# Altium PCB MainBoard.PcbDoc (part 1 of 2)
Units mm, origin at the board's own origin, x right, y up, seen from the top; angles counter-clockwise.
Board outline 100 x 91.6 mm, 4 copper layers (Top Signal, GND, PWR, Bottom Signal), stack 1.586 mm thick; 83 components, 119 nets, 486 pads, 208 vias.
Unrouted connection lines stored in the file: 7.
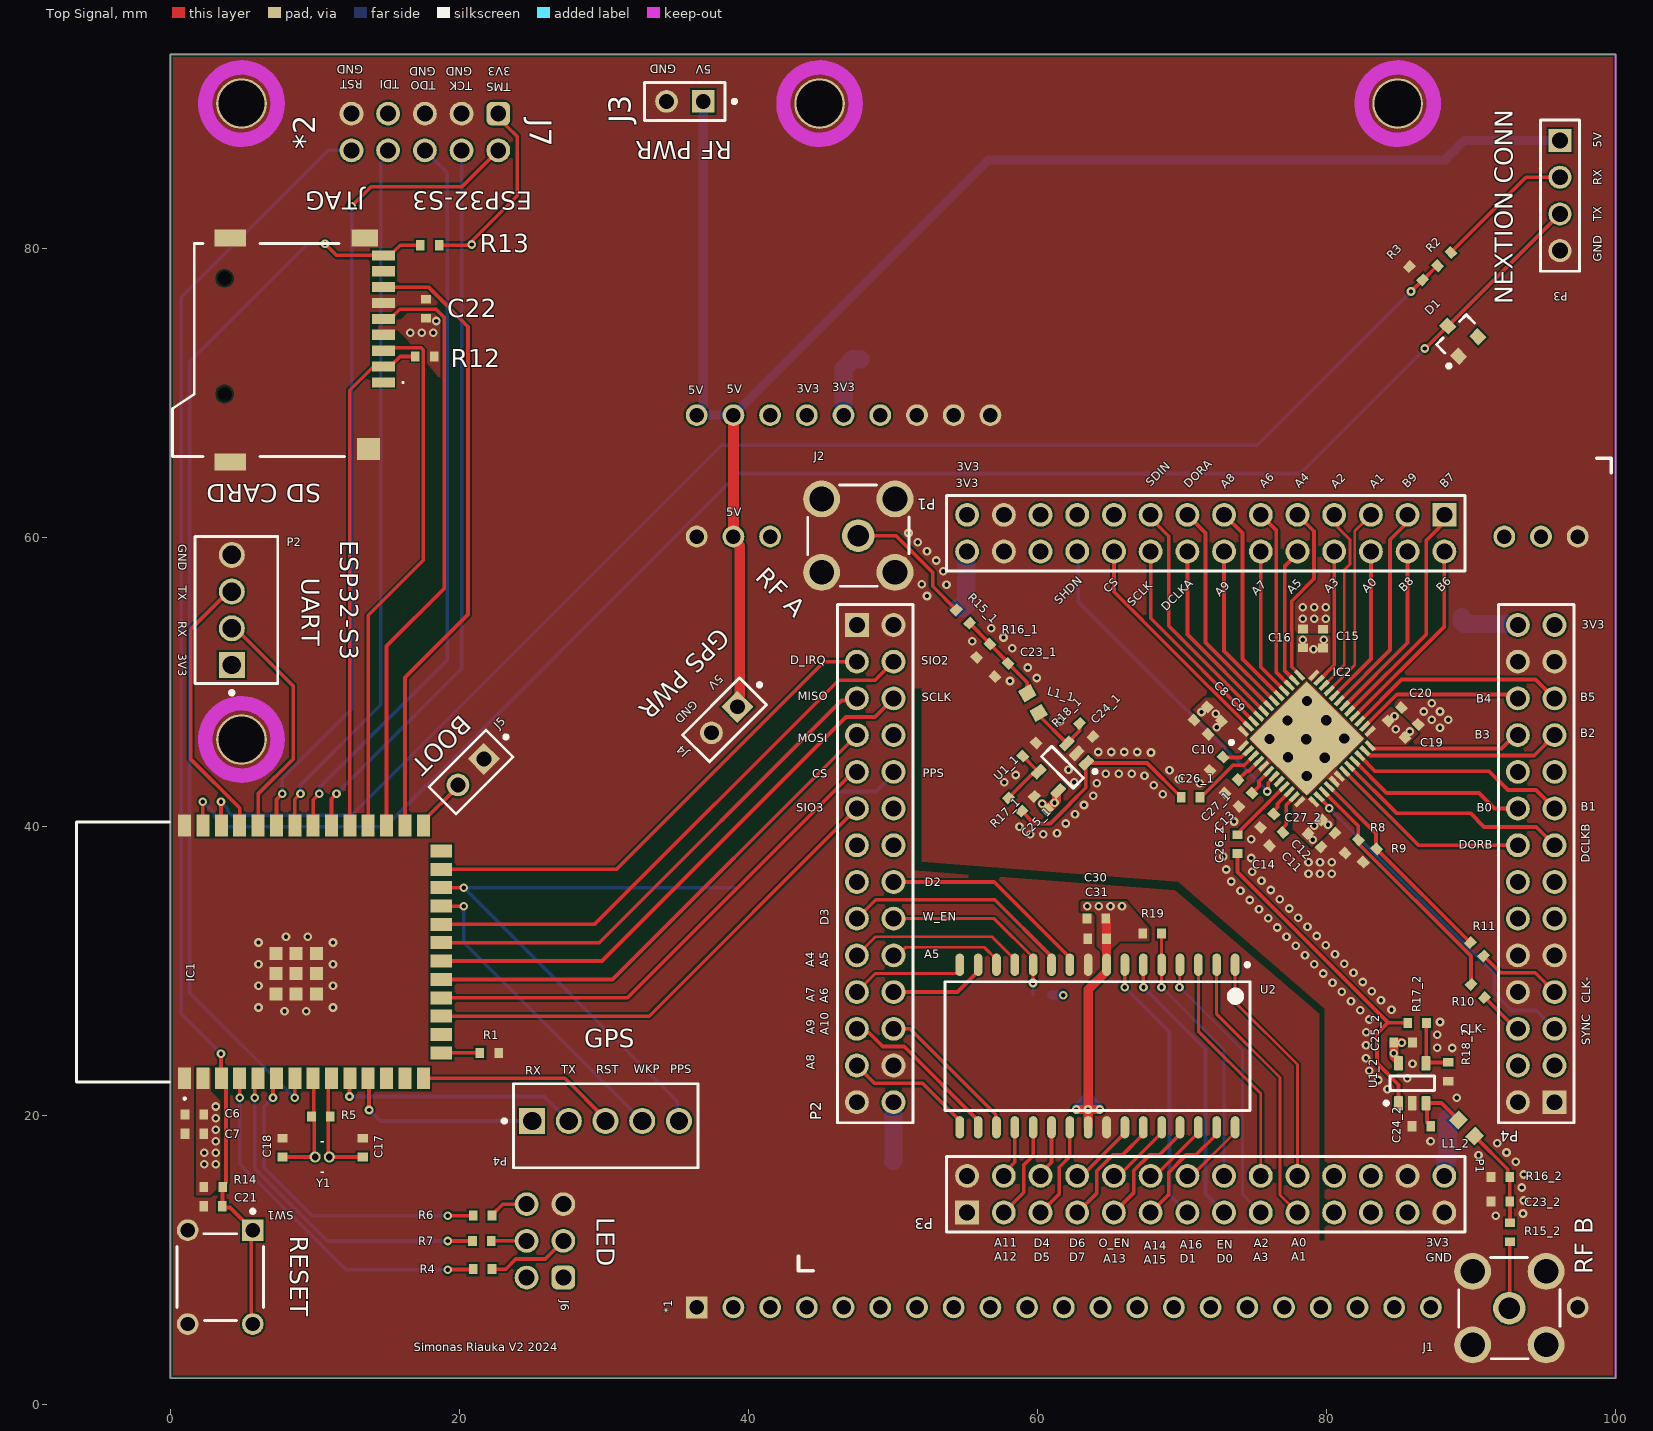
[diagram p0: Top Signal view]
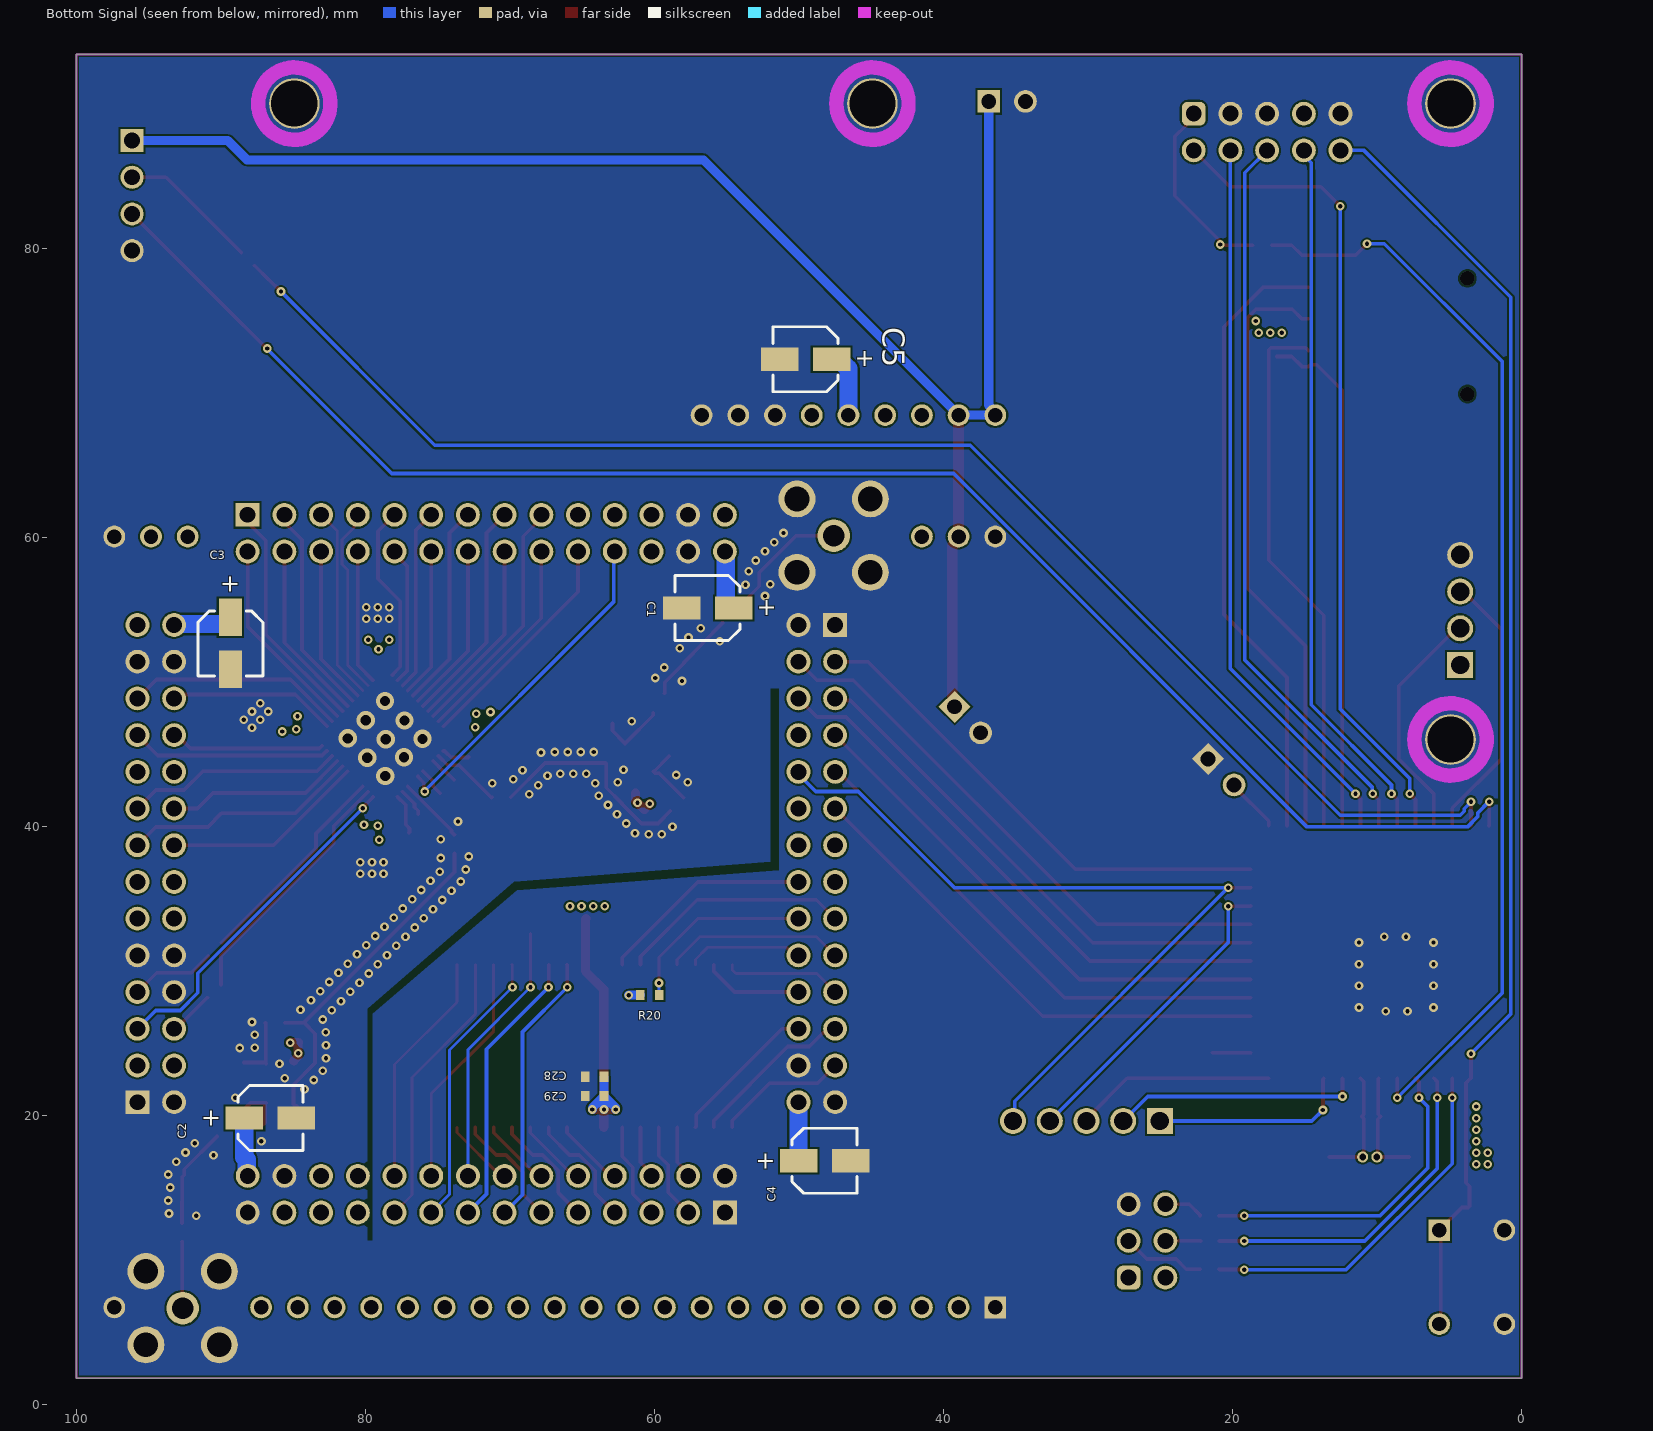
[diagram p1: Bottom Signal view, seen from below]
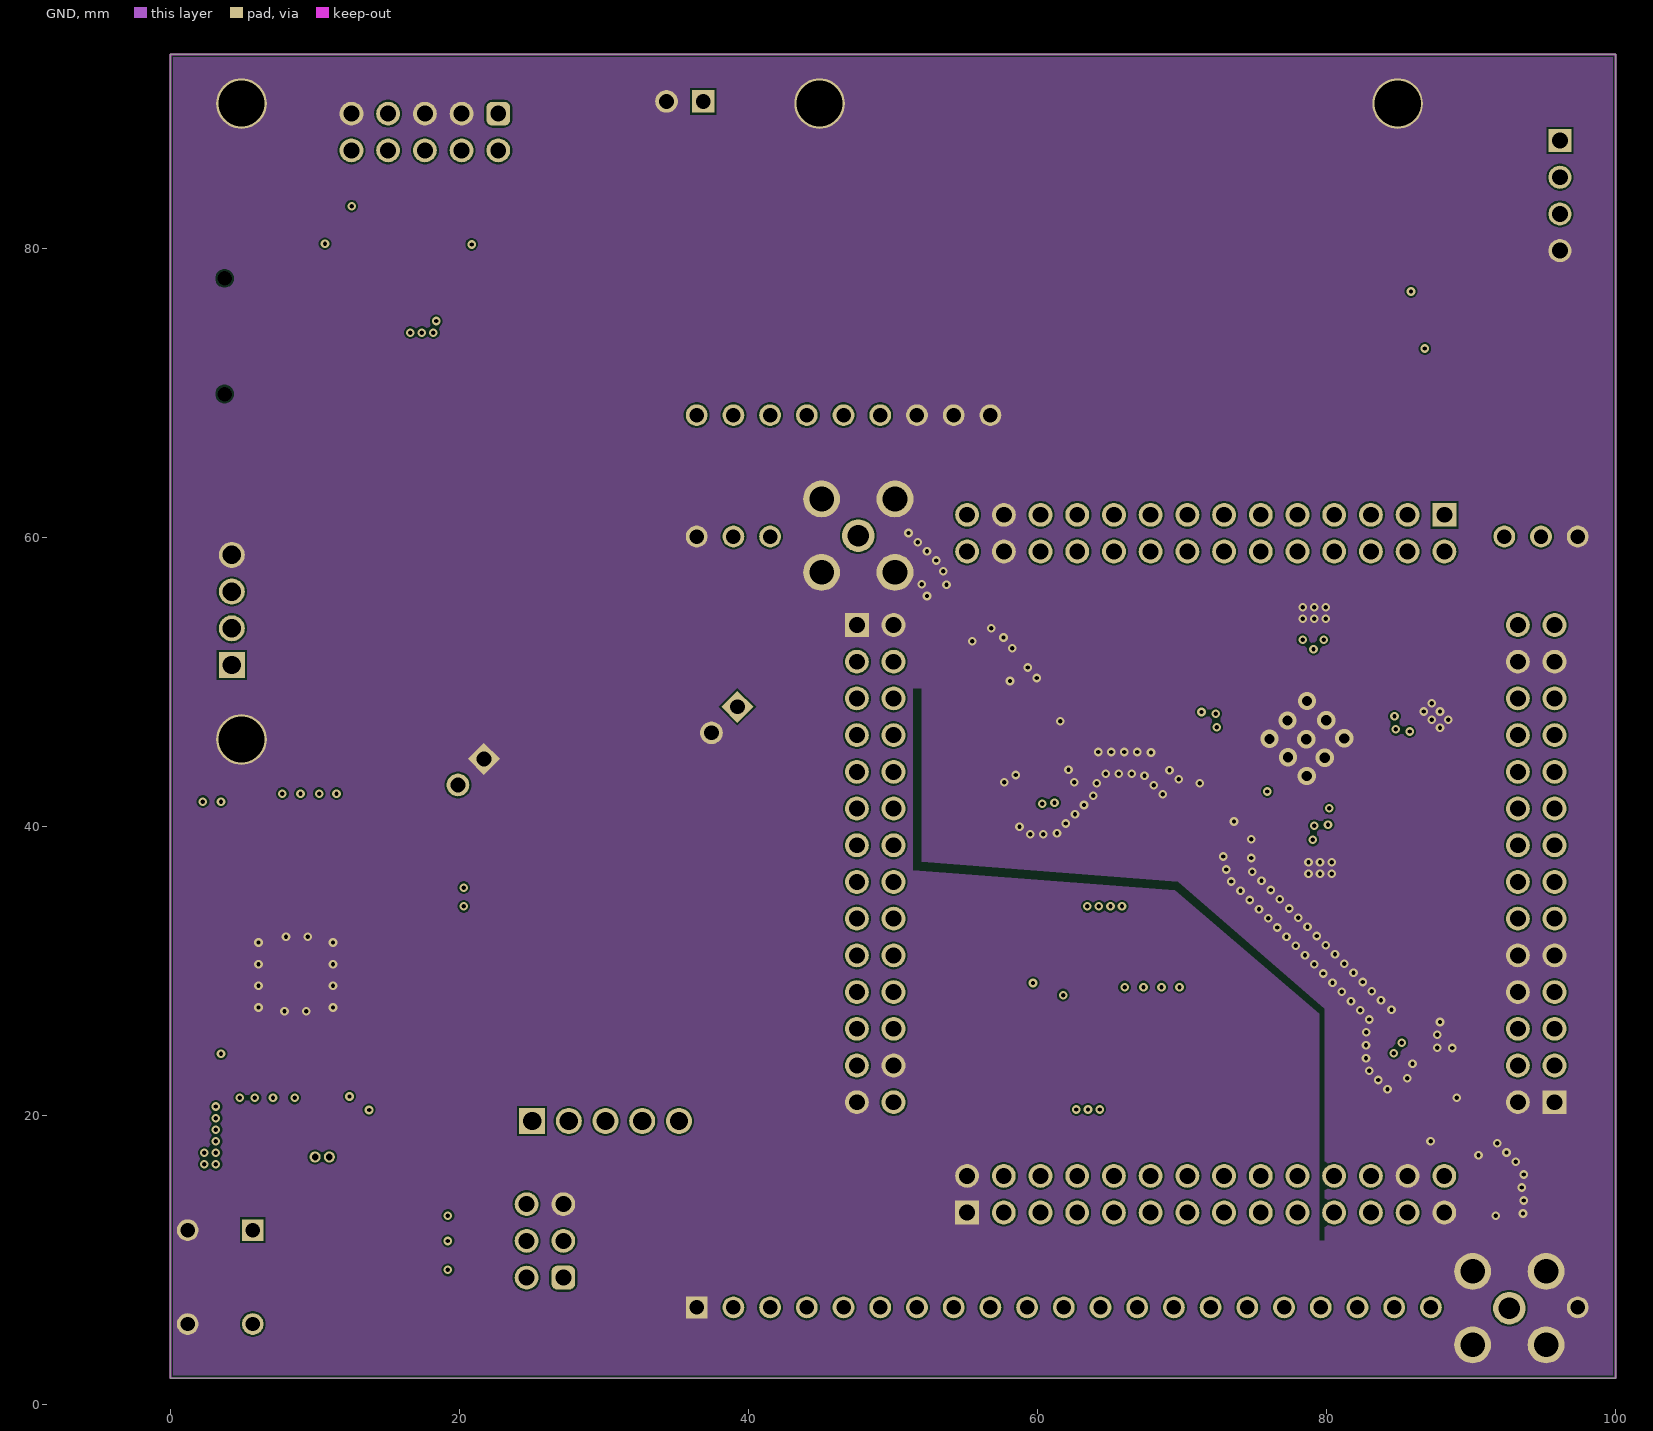
[diagram p2: GND]
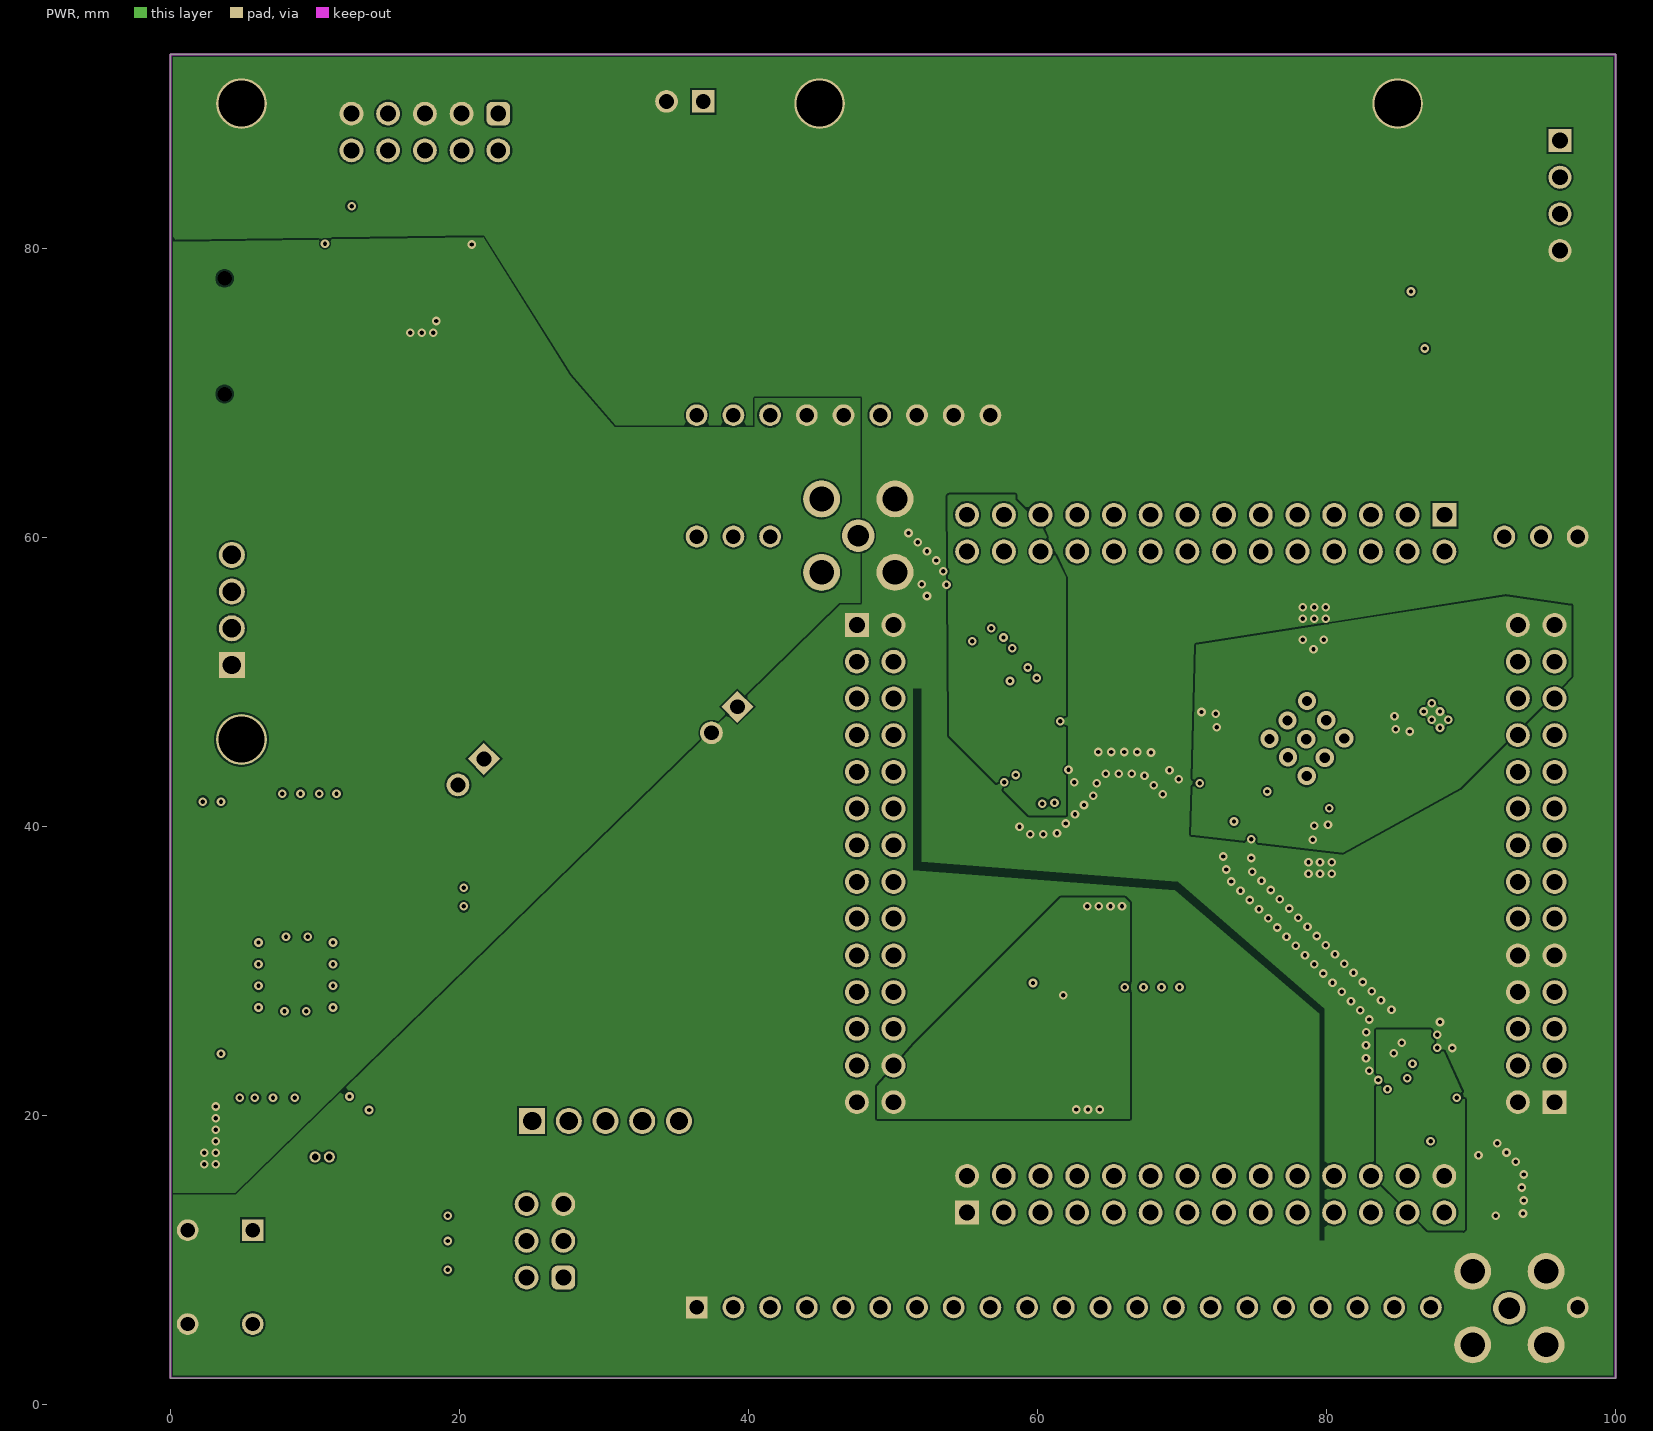
[diagram p3: PWR]

## Layer stack, top to bottom
Top Solder: solder mask 0.0102, Solder Resist, Dk 3.5
Top Signal: signal copper 0.035
Dielectric 2: prepreg 0.2104, PP-006, Dk 4.4
GND: signal copper 0.0152
Dielectric 1: core 1.065, FR-4, Dk 4.6
PWR: signal copper 0.0152
Dielectric 3: prepreg 0.2104, PP-006, Dk 4.4
Bottom Signal: signal copper 0.035
Bottom Solder: solder mask 0.0102, Solder Resist, Dk 3.5

## Board outline
0,1.8 100,1.8 100,93.4 0,93.4

## Design rules (kind name [scope] priority, off if disabled: settings)
Clearance [All] p1: gap=0.127 ignorepadtopadclearanceinfootprint=FALSE
HoleSize [IsVia] p1: absolutevalues=TRUE maxlimit=2.54 minlimit=0.2 maxpercent=80.000 minpercent=20.000
HoleToHoleClearance [All] p1: gap=0.5 allowstackedmicrovias=TRUE
MatchedLengths [InNetClass('BIT579')] p1: tolerance=0.1 checknetsindiffpair=FALSE checkdiffpairvsdiffpair=TRUE checkxsignals=TRUE checkothers=TRUE
MinimumAnnularRing MinimumAnnularRing_1 [All] p1: minimumring=0.13
MinimumSolderMaskSliver [All] p1: minsoldermaskwidth=0.2
PolygonConnect [All] p1: connectstyle=Direct reliefconductorwidth=0.127 reliefentries=4 polygonreliefangle="90 Angle" airgapwidth=0.127
RoutingVias [InNetClass('All Nets')] p1: holewidth=0.711 width=1.27 viastyle="Through Hole" minholewidth=0.3 minwidth=0.5 maxholewidth=0.711 maxwidth=1.27
SilkToSolderMaskClearance [IsPad] p1: minsilkscreentomaskgap=0.152 clearancetoexposedcopper=TRUE
SolderMaskExpansion [All] p1: expansion=0.05 istentingtop=FALSE
Width Text_width [OnLayer('Top Overlay')] p1: maxlimit=0.254 minlimit=0.152 preferedwidth=0.152
Width RF [InNetClass('RF')] p2: maxlimit=0.264 minlimit=0.181 preferedwidth=0.264 toplayer_minwidth=0.264 midlayer1_maxwidth=0.181 midlayer1_prefwidth=0.181 midlayer2_maxwidth=0.181 midlayer2_prefwidth=0.181 bottomlayer_minwidth=0.264 impedanceprofiledriven=TRUE impedanceprofileid={7C84431C-2315-4997-B833-9ADEEC1D2196} impedanceprofilevalue=50.000000 minimp=50.000000 maximp=50.000000 favimp=50.000000
Width [All] p3: maxlimit=2.54 minlimit=0.152 preferedwidth=0.254
26 further rules are at their usual default settings.

## Classes and differential pairs
component class U_Memory: C28 C29 C30 C31 R19 R20 U2
component class U_Connectors: *1 C7 C9 C10 C13 J5 J6 P1
channel class RF_opamp: 1 2
channel class RF_filter: 1 2
component class 1: C25_1 C26_1 C27_1 R17_1 R18_1 U1_1
component class 2: C25_2 C26_2 C27_2 R17_2 R18_2 U1_2
component class 1: C23_1 C24_1 L1_1 R15_1 R16_1
component class 2: C23_2 C24_2 L1_2 R15_2 R16_2
net class RF: ANALOG_INA ANALOG_INB NetC23_1_2 NetC23_2_2 NetC26_1_2 NetC26_2_2 OP_AMP_INA+ OP_AMP_INB+
component class U_Computation: *2 C7 C9 C10 C13 C17 C18 C19 C20 C21 C28 D1 IC1 IC2 J1 J5 J6 P2 P3 P4 R1 R9 R10 R11 R12 R13 R14 SW1 Y1

## Components (designator, comment, footprint, x,y, rotation, side; value= is the part's Value field where it differs from the comment)
*1 "ADS-B_POWER_PCB" ADS-B_POWER_PCB 64.71,40.572 r90 top locked
*2 "2x5_Header" 2X5_HEADER 22.69,89.3 r270 top
C1 "865060640001" WCAP-ASLL_D4H5.5 -1213.678,1325.1 r180 bottom
C2 "865060640001" WCAP-ASLL_D4H5.5 1356.578,-1250.2 r0 bottom
C3 "865060640001" WCAP-ASLL_D4H5.5 1359.35,1322.65 r90 bottom
C4 "865060640001" WCAP-ASLL_D4H5.5 1318.228,-1253.15 r0 bottom
C5 "865060640001" WCAP-ASLL_D4H5.5 -1220.455,1342.309 r180 bottom
C6 "22uF" 0402_FOOTPRINT 1.015,20.062 r0 top
C7 "0.1uF" 0402_FOOTPRINT 1.008,18.72 r0 top
C8 "0.05uF" 0402_FOOTPRINT 70.832,47.339 r45 top
C9 "0.05uF" 0402_FOOTPRINT 71.801,46.358 r45 top
C10 "0.1uF" 0402_FOOTPRINT 72.85,44.781 r225 top
C11 "0.05uF" 0402_FOOTPRINT 79.628,38.564 r135 top
C12 "0.05uF" 0402_FOOTPRINT 80.578,39.514 r135 top
C13 "0.1uF" 0402_FOOTPRINT 73.931,41.362 r45 top
C14 "0.1uF" 0402_FOOTPRINT 76.061,38.643 r45 top
C15 "0.05uF" 0402_FOOTPRINT 79.755,53.629 r270 top
C16 "0.05uF" 0402_FOOTPRINT 78.376,53.637 r270 top
C17 "22pF" 0402_FOOTPRINT 13.315,17.112 r90 top
C18 "22pF" 0402_FOOTPRINT 7.765,17.112 r90 top
C19 "0.05uF" 0402_FOOTPRINT 86.347,47.042 r225 top
C20 "0.05uF" 0402_FOOTPRINT 85.18,48.208 r225 top
C21 "0.1uF" 0402_FOOTPRINT 2.3,13.7 r0 top
C22 "22pF" 0402_footprint 17.7,75.15 r90 top
C23_1 "1.6nF" 0402_FOOTPRINT 57.05,50.35 r45 top (schematic designator C23)
C23_2 "1.6nF" 0402_FOOTPRINT 91.378,14.03 r0 top (schematic designator C23)
C24_1 "1.6nF" 0402_FOOTPRINT 63.831,46.191 r135 top (schematic designator C24)
C24_2 "1.6nF" 0402_FOOTPRINT 85.912,19.238 r0 top (schematic designator C24)
C25_1 "0.1uF" 0402_FOOTPRINT 59.774,42.065 r315 top (schematic designator C25)
C25_2 "0.1uF" 0402_FOOTPRINT 85.954,25.026 r180 top (schematic designator C25)
C26_1 "0.1uF" 0402_FOOTPRINT 71.25,42 r180 top (schematic designator C26)
C26_2 "0.1uF" 0402_FOOTPRINT 73.831,39.412 r270 top (schematic designator C26)
C27_1 "0.1uF" 0402_FOOTPRINT 72.961,42.293 r45 top (schematic designator C27)
C27_2 "0.1uF" 0402_FOOTPRINT 75.431,39.912 r45 top (schematic designator C27)
C28 "0.1uF" 0402_FOOTPRINT 64.79,22.66 r180 bottom
C29 "0.1uF" 0402_FOOTPRINT 64.79,21.334 r180 bottom
C30 "0.1uF" 0402_FOOTPRINT 63.431,33.612 r0 top
C31 "0.1uF" 0402_FOOTPRINT 63.481,32.212 r0 top
D1 "MMBZ5227BLT1G" ONSC-SOT-23-3-318-08_V 89.1,73.9 r135 top
IC1 "ESP32-S3-WROOM-1-N8R8" ESP32S3WROOM1N8R8 6.25,31.3 r90 top
IC2 "MAX19516ETM+" QFN50P700X700X80-49N 78.63,46.06 r45 top
J1 "60312002114503" 60312002114503 92.65,6.65 r0 top
J2 "60312002114503" 60312002114503 47.6,60.1 r0 top
J3 "M20-9990246" FP-M20-9990246-MFG 35.6,90.15 r180 top
J4 "M20-9990246" FP-M20-9990246-MFG 38.338,47.358 r225 top
J5 "M20-9990246" FP-M20-9990246-MFG 20.8,43.75 r225 top
J6 "2x3_Header" "2X3 HEADER" 24.65,8.764 r180 top
J7 "MSD-4-A" MSD4A 7.85,72.95 r270 top
L1_1 "4.7uH" 0603_FOOTPRINT 60.085,47.84 r30 top (schematic designator L1)
L1_2 "4.7uH" 0603_FOOTPRINT 89.14,19.66 r225 top (schematic designator L1)
P1 "FPGA_Shield_headers" FPGA_SHIELD_HEADER_FOOTPRINT 99.818,65.585 r180 top locked
P2 "640456-4" TECO-640456-4 4.25,54.96 r270 top
P3 "61300411121" 61300411121 96.15,83.63 r270 top
P4 "ADS-B_GPS" ADS-B_GPS 30.122,19.64 r0 top
R1 "10kOhm" 0402_FOOTPRINT 22.715,24.312 r180 top
R2 "10kOhm" 0402_footprint 88.604,79.695 r225 top
R3 "10kOhm" 0402_footprint 85.731,78.719 r315 top
R4 "0402" 0402_FOOTPRINT 22.25,9.35 r180 top
R5 "10MOhm" 0402_FOOTPRINT 9.765,19.912 r0 top
R6 "0402" 0402_FOOTPRINT 22.25,13.05 r180 top
R7 "0402" 0402_FOOTPRINT 20.9,11.3 r0 top
R8 "0402" 0402_FOOTPRINT 82.2,39.05 r225 top
R9 "0402" 0402_FOOTPRINT 83.462,38.43 r225 top
R10 "0402" 0402_FOOTPRINT 90.919,28.131 r135 top
R11 "0402" 0402_FOOTPRINT 89.955,31.937 r315 top
R12 "10kOhm" 0402_footprint 16.95,72.5 r0 top
R13 "10kOhm" 0402_footprint 17.3,80.2 r0 top
R14 "0402" 0402_FOOTPRINT 3.615,15.037 r180 top
R15_1 "0402" 0402_FOOTPRINT 54.381,54.969 r315 top (schematic designator R15)
R15_2 "0402" 0402_FOOTPRINT 92.7,11.25 r90 top (schematic designator R15)
R16_1 "0402" 0402_FOOTPRINT 55.781,51.681 r45 top (schematic designator R16)
R16_2 "0402" 0402_FOOTPRINT 91.378,15.727 r0 top (schematic designator R16)
R17_1 "open" 0402_FOOTPRINT 57.99,41.963 r315 top (schematic designator R17)
R17_2 "open" 0402_FOOTPRINT 86.919,26.37 r180 top (schematic designator R17)
R18_1 "open" 0402_FOOTPRINT 59.901,45.763 r225 top (schematic designator R18)
R18_2 "open" 0402_FOOTPRINT 88.42,22.357 r90 top (schematic designator R18)
R19 "10k" 0402_FOOTPRINT 68.581,32.562 r180 top
R20 "10k" 0402_FOOTPRINT 59.681,28.312 r0 bottom
SW1 "1825910-6" TECO-1825910-6_V 3.45,8.8 r270 top
U1_1 "LMH6645MF/NOPB" DBV0005A_N 61.733,44.078 r225 top (schematic designator U1)
U1_2 "LMH6645MF/NOPB" DBV0005A_N 85.931,22.209 r90 top (schematic designator U1)
U2 "IS63LV1024L" ISSI-TSOP-2-32_N 64.146,24.787 r270 top
Y1 "ECS-.327-12.5-8X-C" ECS3271258XC 10.515,17.112 r180 top

## Footprints (in the part's own frame and the unit in brackets; to place one, negate y for a bottom-side part, rotate by r counter-clockwise, add the part's x,y. Pads: shape width x height; smd on the part's side, far side on the other; paste and mask are expansions set on the pad)
"2X3 HEADER" [mm]
  rrect50% 1.65x1.65 hole 1.1: 1(-2.54,0)
  round 1.65 hole 1.1: 2(0,0) 3(-2.54,-2.54) 4(0,-2.54) 5(-2.54,-5.08) 6(0,-5.08)
2X5_HEADER [mm]
  rrect50% 1.65x1.65 hole 1.1: 1(0,0)
  round 1.65 hole 1.1: 2(2.54,0) 3(0,-2.54) 4(2.54,-2.54) 5(0,-5.08) 6(2.54,-5.08) 7(0,-7.62) 8(2.54,-7.62) 9(0,-10.16) 10(2.54,-10.16)
0402_FOOTPRINT [mm]
  rect 0.6x0.7 smd: 1(0,0) 2(1.3,0)
0402_footprint [mm]
  rect 0.6x0.7 smd: 1(0,0) 2(1.3,0)
0603_FOOTPRINT [mm]
  rect 0.97x0.9 smd: 1(0,1.57) 2(0,0)
61300411121 [mm] "Pin Header, pitch 2.54 mm, THT, Vertical, single row, 4p"
  rect 1.6x1.6 hole 1.1: 1(-3.81,0)
  round 1.6 hole 1.1: 2(-1.27,0) 3(1.27,0) 4(3.81,0)
  silkscreen extent -5.23,-1.35 5.23,1.35, body extent -5.08,-1.27 5.08,1.27, height 8.57
60312002114503 [mm] "SMA PCB THT Jack Straight"
  round 2.25 hole 1.5: 1(0,0)
  round 2.55 hole 1.7: 2(-2.54,2.54) 3(2.54,2.54) 4(2.54,-2.54) 5(-2.54,-2.54)
  silkscreen extent -3.5,-3.5 3.5,3.5, body extent -3.5,-3.5 3.5,3.5, height 9.56
ADS-B_GPS [mm]
  rect 1.8x1.8 hole 1.27 paste-2539.97: 1(-5.092,-0.04)
  round 1.8 hole 1.27 paste-2539.97: 2(-2.552,-0.04) 3(-0.012,-0.04) 4(2.528,-0.04) 5(5.068,-0.04)
  silkscreen extent -7.14,-3.28 6.38,2.54, body extent -6.36,-3.22 6.34,2.63, height 10.29
ADS-B_POWER_PCB [mm]
  rect 1.508x1.508 hole 1: 1(-33.872,28.29)
  round 1.508 hole 1: 2(-33.872,25.75) 3(-33.872,23.21) 4(-33.872,20.67) 5(-33.872,18.13) 6(-33.872,15.59) 7(-33.872,13.05) 8(-33.872,10.51) 9(-33.872,7.97) 10(-33.872,5.43) 11(-33.872,2.89) 12(-33.872,0.35) 13(-33.872,-2.19) 14(-33.872,-4.73) 15(-33.872,-7.27) 16(-33.872,-9.81) 17(-33.872,-12.35) 18(-33.872,-14.89) 19(-33.872,-17.43) 20(-33.872,-19.97) 21(-33.872,-22.51) 25(-33.872,-32.67) 26(19.468,28.29) 27(19.468,25.75) 28(19.468,23.21) 35(19.468,-27.59) 36(19.468,-30.13) 37(19.468,-32.67) 38(27.868,28.29) 39(27.868,25.75) 40(27.868,23.21) 41(27.868,20.67) 42(27.868,18.13) 43(27.868,15.59) 44(27.868,13.05) 45(27.868,10.51) 46(27.868,7.97)
  round 3.5 hole 3.2: G(5.428,59.79) G(49.428,59.79) G(49.428,-20.21) G(49.428,19.79)
  Top Signal keep-out circle w1: c49.428,19.79 r2.5
  Top Signal keep-out circle w1: c49.428,-20.21 r2.5
  Top Signal keep-out circle w1: c49.428,59.79 r2.5
  Top Signal keep-out circle w1: c5.428,59.79 r2.5
  Bottom Signal keep-out circle w1: c49.428,-20.21 r2.5
  Bottom Signal keep-out circle w1: c49.428,19.79 r2.5
  Bottom Signal keep-out circle w1: c49.428,59.79 r2.5
  Bottom Signal keep-out circle w1: c5.428,59.79 r2.5
DBV0005A_N [mm] "SOT23, 5-Leads, Body 3.05x1.75mm, Pitch 0.95mm, IPC Medium Density"
  rrect17% 1x0.6 smd: 1(-1.375,0.95) 2(-1.375,0) 3(-1.375,-0.95) 4(1.375,-0.95) 5(1.375,0.95)
  silkscreen extent -1.5,-1.55 0.5,1.92, body extent -1.42,-1.46 1.42,1.46, height 1.08
ECS3271258XC [mm]
  round 0.77 hole 0.46: 1(-0.485,0) 2(0.5,0)
  silkscreen extent -0.1,-1.05 0.1,1.05, body extent -1.04,-1.05 1.04,1.05, height 6.2
ESP32S3WROOM1N8R8 [mm]
  rect 1.5x0.9 smd: 1(-8.75,5.26) 2(-8.75,3.99) 3(-8.75,2.72) 4(-8.75,1.45) 5(-8.75,0.18) 6(-8.75,-1.09) 7(-8.75,-2.36) 8(-8.75,-3.63) 9(-8.75,-4.9) 10(-8.75,-6.17) 11(-8.75,-7.44) 12(-8.75,-8.71) 13(-8.75,-9.98) 14(-8.75,-11.25) 27(8.75,-11.25) 28(8.75,-9.98) 29(8.75,-8.71) 30(8.75,-7.44) 31(8.75,-6.17) 32(8.75,-4.9) 33(8.75,-3.63) 34(8.75,-2.36) 35(8.75,-1.09) 36(8.75,0.18) 37(8.75,1.45) 38(8.75,2.72) 39(8.75,3.99) 40(8.75,5.26)
  rect 0.9x1.5 smd: 15(-6.985,-12.5) 16(-5.715,-12.5) 17(-4.445,-12.5) 18(-3.175,-12.5) 19(-1.905,-12.5) 20(-0.635,-12.5) 21(0.635,-12.5) 22(1.905,-12.5) 23(3.175,-12.5) 24(4.445,-12.5) 25(5.715,-12.5) 26(6.985,-12.5)
  rect 0.9x0.9 smd: 41(-1.5,-2.46) 42(-1.5,-1.06) 43(-2.9,-1.06) 44(-2.9,-2.46) 45(-2.9,-3.86) 46(-1.5,-3.86) 47(-0.1,-3.86) 48(-0.1,-2.46) 49(-0.1,-1.06)
  silkscreen extent -10.2,5.21 9,12.75, body extent -9,-13 9,12.5, height 3.1
FP-M20-9990246-MFG [mm]
  rect 1.57x1.57 hole 1.02 paste-2539.97 mask+0: 1(-1.27,0)
  round 1.57 hole 1.02 paste-2539.97 mask+0: 2(1.27,0)
  silkscreen extent -3.55,-1.32 2.79,1.32, body extent -2.89,-1.42 2.89,1.42, height 0.25
FPGA_SHIELD_HEADER_FOOTPRINT [mm]
  rect 1.65x1.65 hole 1.1: 1(4.04,44.685) 56(44.689,52.321) 84(52.318,11.665) 85(11.666,4.04)
  round 1.65 hole 1.1: 2(6.58,44.685) 3(4.04,42.145) 4(6.58,42.145) 5(4.04,39.605) 6(6.58,39.605) 7(4.04,37.065) 8(6.58,37.065) 9(4.04,34.525) 10(6.58,34.525) 11(4.04,31.985) 12(6.58,31.985) 13(4.04,29.445) 14(6.58,29.445) 15(4.04,26.905) 16(6.58,26.905) 17(4.04,24.365) 18(6.58,24.365) 19(4.04,21.825) 20(6.58,21.825) 21(4.04,19.285) 22(6.58,19.285) 23(4.04,16.745) 24(6.58,16.745) 25(4.04,14.205) 26(6.58,14.205) 27(4.04,11.665) 28(6.58,11.665) 29(11.669,49.781) 30(11.669,52.321) 31(14.209,49.781) 32(14.209,52.321) 33(16.749,49.781) 34(16.749,52.321) 35(19.289,49.781) 36(19.289,52.321) 37(21.829,49.781) 38(21.829,52.321) 39(24.369,49.781) 40(24.369,52.321) 41(26.909,49.781) 42(26.909,52.321) 43(29.449,49.781) 44(29.449,52.321) 45(31.989,49.781) 46(31.989,52.321) 47(34.529,49.781) 48(34.529,52.321) 49(37.069,49.781) 50(37.069,52.321) 51(39.609,49.781) 52(39.609,52.321) 53(42.149,49.781) 54(42.149,52.321) 55(44.689,49.781) 57(49.778,44.685) 58(52.318,44.685) 59(49.778,42.145) 60(52.318,42.145) 61(49.778,39.605) 62(52.318,39.605) 63(49.778,37.065) 64(52.318,37.065) 65(49.778,34.525) 66(52.318,34.525) 67(49.778,31.985) 68(52.318,31.985) 69(49.778,29.445) 70(52.318,29.445) 71(49.778,26.905) 72(52.318,26.905) 73(49.778,24.365) 74(52.318,24.365) 75(49.778,21.825) 76(52.318,21.825) 77(49.778,19.285) 78(52.318,19.285) 79(49.778,16.745) 80(52.318,16.745) 81(49.778,14.205) 82(52.318,14.205) 83(49.778,11.665) 86(11.666,6.58) 87(14.206,4.04) 88(14.206,6.58) 89(16.746,4.04) 90(16.746,6.58) 91(19.286,4.04) 92(19.286,6.58) 93(21.826,4.04) 94(21.826,6.58) 95(24.366,4.04) 96(24.366,6.58) 97(26.906,4.04) 98(26.906,6.58) 99(29.446,4.04) 100(29.446,6.58) 101(31.986,4.04) 102(31.986,6.58) 103(34.526,4.04) 104(34.526,6.58) 105(37.066,4.04) 106(37.066,6.58) 107(39.606,4.04) 108(39.606,6.58) 109(42.146,4.04) 110(42.146,6.58) 111(44.686,4.04) 112(44.686,6.58)
  silkscreen extent 0.13,0.13 56.35,56.35, body extent 2.77,2.77 53.59,53.59, height 8.59
ISSI-TSOP-2-32_N [mm] "SOP, 32-Leads, Body 21.1x10.3mm, Pitch 1.27mm, IPC Medium Density"
  oval 1.55x0.6 smd: 1(-5.625,9.525) 2(-5.625,8.255) 3(-5.625,6.985) 4(-5.625,5.715) 5(-5.625,4.445) 6(-5.625,3.175) 7(-5.625,1.905) 8(-5.625,0.635) 9(-5.625,-0.635) 10(-5.625,-1.905) 11(-5.625,-3.175) 12(-5.625,-4.445) 13(-5.625,-5.715) 14(-5.625,-6.985) 15(-5.625,-8.255) 16(-5.625,-9.525) 17(5.625,-9.525) 18(5.625,-8.255) 19(5.625,-6.985) 20(5.625,-5.715) 21(5.625,-4.445) 22(5.625,-3.175) 23(5.625,-1.905) 24(5.625,-0.635) 25(5.625,0.635) 26(5.625,1.905) 27(5.625,3.175) 28(5.625,4.445) 29(5.625,5.715) 30(5.625,6.985) 31(5.625,8.255) 32(5.625,9.525)
  silkscreen extent -5.75,-10.55 4.45,10.55, body extent -5.15,-10.55 5.15,10.55, height 1.2
MSD4A [mm]
  rect 0.7x1.6 smd: 1(2.25,6.9) 2(1.15,6.9) 3(0.05,6.9) 4(-1.05,6.9) 5(-2.15,6.9) 6(-3.25,6.9) 7(-4.35,6.9) 8(-5.45,6.9) CD1(-6.55,6.9)
  rect 1.5x1.6 smd: G1(6.85,5.85)
  rect 1.2x2.2 smd: G2(7.75,-3.7) G3(-7.75,-3.7)
  rect 1.2x1.8 smd: G4(-7.75,5.6)
  round 0.5 hole 1 unplated: MH1(3.05,-4.1) MH2(-4.95,-4.1)
  silkscreen extent -7.37,-7.7 7.37,8.3, body extent -8.08,-7.25 8.03,7.8, height 1.9
ONSC-SOT-23-3-318-08_V [mm] "SOT23, 3-Leads, Body 2.92x1.3mm, Pitch 0.95mm"
  rect 0.9x0.8 smd: 1(-1,0.95) 2(-1,-0.95) 3(1,0)
  silkscreen extent -1.12,-1.46 0.65,2.02, body extent -0.65,-1.46 0.65,1.46, height 1.11
QFN50P700X700X80-49N [mm]
  rect 0.85x0.3 smd mask+0.025: 1(-3.45,2.75) 12(-3.45,-2.75) 25(3.45,-2.75) 36(3.45,2.75)
  rect 0.85x0.3 smd: 2(-3.45,2.25) 3(-3.45,1.75) 4(-3.45,1.25) 5(-3.45,0.75) 6(-3.45,0.25) 7(-3.45,-0.25) 8(-3.45,-0.75) 9(-3.45,-1.25) 10(-3.45,-1.75) 11(-3.45,-2.25) 26(3.45,-2.25) 27(3.45,-1.75) 28(3.45,-1.25) 29(3.45,-0.75) 30(3.45,-0.25) 31(3.45,0.25) 32(3.45,0.75) 33(3.45,1.25) 34(3.45,1.75) 35(3.45,2.25)
  rect 0.3x0.85 smd mask+0.025: 13(-2.75,-3.45) 24(2.75,-3.45) 37(2.75,3.45) 48(-2.75,3.45)
  rect 0.3x0.85 smd: 14(-2.25,-3.45) 15(-1.75,-3.45) 16(-1.25,-3.45) 17(-0.75,-3.45) 18(-0.25,-3.45) 19(0.25,-3.45) 20(0.75,-3.45) 21(1.25,-3.45) 22(1.75,-3.45) 23(2.25,-3.45) 38(2.25,3.45) 39(1.75,3.45) 40(1.25,3.45) 41(0.75,3.45) 42(0.25,3.45) 43(-0.25,3.45) 44(-0.75,3.45) 45(-1.25,3.45) 46(-1.75,3.45) 47(-2.25,3.45)
  rect 5.6x5.6 smd: 49(0,0)
  silkscreen extent -4,3.38 -3.75,3.62, body extent -3.55,-3.55 3.55,3.55, height 0.8
TECO-640456-4 [mm] "Through Hole, 4-Leads, Body 10.16x5.72mm, Pitch 2.54mm"
  rect 1.8x1.8 hole 1.27 paste-2539.97: 1(3.81,0)
  round 1.8 hole 1.27 paste-2539.97: 2(1.27,0) 3(-1.27,0) 4(-3.81,0)
  silkscreen extent -5.08,-2.54 5.86,3.18, body extent -5.08,-2.54 5.08,3.18, height 10.03
TECO-1825910-6_V [mm] "Switch, 4-Leads, Body 5.99x5.99mm"
  rect 1.5x1.5 hole 0.99: 1(-3.25,2.25)
  round 1.5 hole 0.99: 2(3.25,2.25) 3(-3.25,-2.25) 4(3.25,-2.25)
  silkscreen extent -4.67,-3 2.99,2.99, body extent -3,-3 2.99,3, height 5
WCAP-ASLL_D4H5.5 [mm] "Aluminium Electrolytic V-Chip SMT Capacitors, 4x5.5mm"
  rect 2.6x1.6 smd: 1(-1268.2,-1270) 2(-1271.8,-1270)
  silkscreen extent -1272.25,-1272.25 -1267.75,-1267.75, body extent -1272.5,-1272.15 -1267.5,-1267.85, height 5.5

## Part data
C1 C2 C3 C4 C5: library part CMP-03913-53914524-1, "865060640001 WCAP-ASLL Aluminum Electrolytic Capacitors", Capacitance=1µF, Case/Package=Radial, Insulation Resistance=16.6667MΩ, Leakage Current=3µA, Max Operating Temperature=105°C, Min Operating Temperature=-55°C, Ripple Current=60mA, Tolerance=20%, Voltage Rating=50V, Diameter=4mm, Height=5.5mm, Height - Seated (Max)=5.5118mm, Impedance=4.4Ω, Length=5.5mm, Life (Hours)=2000hours, Mount="Surface Mount", NexarPartId=53914524, Packaging="Tape & Reel (TR)", Polarity=Polar, REACH SVHC=Unknown, Ripple Current (AC)=60mA, RoHS=Compliant, Voltage Rating (DC)=50V
  C1: ComponentLink1Description=Buy, ComponentLink1URL=https://www.we-online.com/en/components/products/WCAP-ASLL#/articles/WCAP_ASLL_SIZE_4
C6 C7 C8 C9 C10 C11 C12 C13 C14 C15 C16 C17 C18 C19 C20 C21 C22 C23_1 C23_2 C24_1 C24_2 C25_1 C25_2 C26_1 C26_2 C27_1 C27_2 C28 C29 C30 C31: library part Capacitor_0402, "0402 capacitor"
D1: library part CMP-1060-00983-1, "Zener Voltage Regulator, 225 mW, 3-Pin SOT-23, Pb-Free, Tape and Reel", Manufacturer="On Semiconductor", ComponentLink1Description="Manufacturer URL", ComponentLink1URL=http://www.onsemi.com/, ComponentLink2Description=Datasheet, ComponentLink2URL=http://www.onsemi.cn/pub_link/Collateral/MMBZ5221BLT1-D.PDF, ComponentLink3Description="Package Specification", ComponentLink3URL=http://www.onsemi.cn/pub_link/Collateral/318-08.PDF, ComponentLink4Description=Buy, ComponentLink4URL=https://www.mouser.lt/ProductDetail/onsemi/MMBZ5227BLT1G?qs=P4IOph%252Bbot%252Bc24HkQGoTVg%3D%3D, DatasheetVersion="Rev. 12", Mounting Technology="Surface Mount", PackageDescription="3-Pin Small Outline Transistor, Body 2.92 x 1.3 mm, Pitch 0.95 mm", PackageReference=SOT-23-3-318-08, PackageVersion="Rev. AP, 11/2009", Packing="Tape and Reel", PartNumber=MMBZ5227BLT1G, RoHS=Pb-Free, VZ Typ (V)=3.6
IC1: "Integrated Circuit", Manufacturer_Name="Espressif Systems", Mouser Part Number=356-EP32S3WROOM1N8R8, ComponentLink1Description="S3 datasheet", ComponentLink1URL=https://www.espressif.com/sites/default/files/documentation/esp32-s3_datasheet_en.pdf, ComponentLink2Description="Wroom datasheet", ComponentLink2URL=https://www.espressif.com/sites/default/files/documentation/esp32-s3-wroom-1_wroom-1u_datasheet_en.pdf, ComponentLink3Description="Reference manual", ComponentLink3URL=https://www.espressif.com/sites/default/files/documentation/esp32-s3_technical_reference_manual_en.pdf, Datasheet Link=https://www.espressif.com/sites/default/files/documentation/esp32-s3-wroom-1_wroom-1u_datasheet_en.pdf, Height=3.25mm, Manufacturer_Part_Number=ESP32-S3-WROOM-1-N8R8, Mouser Price/Stock=https://www.mouser.co.uk/ProductDetail/Espressif-Systems/ESP32-S3-WROOM-1-N8R8?qs=7D1LtPJG0i3%2F28hKFavOpQ%3D%3D
IC2: "Integrated Circuit", Manufacturer_Name="Maxim Integrated", Mouser Part Number=700-MAX19516ETM, Datasheet Link=https://datasheets.maximintegrated.com/en/ds/MAX19516.pdf, Height=0.8mm, Manufacturer_Part_Number=MAX19516ETM+, Mouser Price/Stock=https://www.mouser.co.uk/ProductDetail/Maxim-Integrated/MAX19516ETM%2b/?qs=1THa7WoU59FJ2JI%2FsSE3dA%3D%3D
J1 J2: library part CMP-207975-000002-2, "SMA PCB THT JACK STRAIGHT WR-SMA", Dielectric Material=PTFE, Frequency=18GHz, Insulation Resistance=5GΩ, Max Operating Temperature=165°C, Min Operating Temperature=-65°C, Voltage Rating=335V, Connector Type=SMA, Contact Material="Gold, Nickel", Height=9.76mm, Impedance=50Ω, Insertion Loss (dB)=0.14dB, Insulation Material=PTFE, NexarPartId=97004423, Number of Contacts=1, Orientation=Straight
J3 J4 J5: library part CMP-15831-000009-1, "CONN HEADER VERT 2POS 2.54MM", Current Rating=3A, Manufacturer=Harwin, Temperature="-40°C to +105°C", Temperature Range High=+105°C, Temperature Range Low=-40°C, Automotive=No, Category=Conn, ComponentLink2Description=Datasheet, ComponentLink2URL=https://cdn.harwin.com/pdfs/M20-999.pdf, Conn Gender=Male, Conn Orientation=Vertical, Contact Material=Tin,Nickel, Device Class L1=Connectors, Device Class L2="Headers and Wire Housings", Device Class L3=unset, Digikey Description="CONN HEADER VERT 2POS 2.54MM", Height=8.99mm, Lead Free=Yes, Manufacturer Part Number=M20-9990246, Mouser Description="2.54mm (0.1\") Pitch SIL Vertical PC Tail Pin Header, 6.1mm mating pin height, tin, 2 contacts", Number of Contacts=2, Number Of Rows=1, Octopart=https://octopart.com/m20-9990246-harwin-2590635, Package=M20-9990246, Pitch=2.54mm, RoHS=TRUE
J7: "Connector", Manufacturer_Name="CUI Devices", Datasheet Link=https://www.cuidevices.com/product/resource/pdf/msd-4-a.pdf, Height=2mm, Manufacturer_Part_Number=MSD-4-A
L1_1 L1_2: library part Inductor_0603, "0603 inductor"
P2: library part CMP-2000-05419-1, "Male Header, Pitch 2.54 mm, 1 x 4 Position, Height 10.03 mm, Tail Length 3.56 mm, RoHS, Bulk", Color=White, Current, Rating="5 /  / A", Flammability Rating=UL94V-0, Manufacturer="TE Connectivity", Temperature, Operating="-55to+105 /  / degC", Voltage, Rating="250 /  / V", Agency Approvals=CSA,UL, Angle=Straight, Brand/Series=MTA-100Series, Color, Housing=White, Connector Type=MTA-100, Contact Centerline Spacing="0.100 /  / in.", Contact Mating Area Plating=Tin, Contact Plating=Tin, Contact Shape=Square, Contact Termination Area Plating=Tin, Datasheet URL=https://datasheet.ciiva.com/16286/eng-ds-82056-mta-0608-16286228.pdf, Datasheet Version=Dec-14, Length, Overall="0.4 /  / \"", Length, Pin="0.14 /  / \"", Length, Terminal Post="0.14 /  / in.", Manufacturer URL=http://www.te.com/, Material, Contact=CopperAlloy, Material, Housing=Polyester, Mount Angle=Vertical, Mounting Hole Size="0.04 /  / \"", Mounting Type=PCMount, Number of Contacts=4, Number of Positions=4, Number Of Rows=1, Pin Spacing="0.1 /  / \"", Primary Type=InterconnectSystem, Size, Post="0.025 /  / in.", Special Features=Pinstrip, Standards=RoHSCompliant,ELVCompliant,UL94V-0, Termination=Solder, Type=PCBPlug
P3: library part CMP-1502-01064-1, "THT Vertical Pin Header WR-PHD, Pitch 2.54 mm, Single Row, 4 pins", Contact Resistance=20mOhm, Manufacturer="Wurth Elektronik", Operating Temperature=-40to105degC, Rated Current=3A, Withstanding Voltage=500VAC, Working Voltage=250VAC, Datasheet URL=https://katalog.we-online.de/em/datasheet/6130xx11121.pdf, Gender=Male, Manufacturer URL=http://www.we-online.de, Mounting Technology=THT, Orientation=Vertical, Package Reference=61300411121, Packaging=Bag, Part Number=61300411121, Pin Number=4, Pitch=2.54mm, Publisher=WurthElektronik, Row Number=Single
R1 R2 R3 R4 R5 R6 R7 R8 R9 R10 R11 R12 R13 R14: library part Resistor_0402, "0402 resistor"
R15_1 R15_2 R16_1 R16_2 R17_1 R17_2 R18_1 R18_2 R19 R20: library part Resistor_0402
SW1: library part CMP-1684-00021-1, "Tact Switch, SPST-NO, 0.05 A, -35 to 85 degC, 4-Pin THD, RoHS, Bulk", Actuator Color=Black, Contact Rating @ Voltage=0.05A@24VDC, Dielectric Strength=500VAC, Manufacturer="TE Connectivity", Maximum AC Voltage Rating=N/A, Maximum Contact Resistance=100mOhm, Maximum DC Voltage Rating=24V, Minimum Insulation Resistance=100MOhm, Operating Temperature=-35to85C, Package Description="4-Pin Through Hole Device, Body 5.99 x 5.99 mm, Pitch 6.5 mm", Package Reference=THD, Actuator Length=1.4mm, Actuator Material=PolybutyleneTerephthalate, Actuator Style=RoundButton, Base Material=N/A, Body Orientation=Straight, Bushing Type=Unthreaded, Contact Material=CopperAlloy, Contact Plating=Silver, Datasheet URL=http://www.te.com/commerce/DocumentDelivery/DDEController?Action=showdoc&DocId=Customer+Drawing%7F1825910%7FC9%7Fpdf%7FEnglish%7FENG_CD_1825910_C9.pdf%7F1825910-6, Datasheet Version="Rev. C9", Dimension=5.99x5mm, Electrical Life=100000Cycles, Family=1825910, Function=MomentaryContact, Housing Material=N/A, Illumination=N/R, Manufacturer URL=http://www.te.com, Mechanical Life=100000Cycles, Mounting=ThroughHole, Packaging=N/A, Part No=1825910-6, Pole Throw Configuration=SPST, Product Weight=N/A, RoHS=Yes, Seal Description=N/A, Seal Location=N/A, Switch Configuration=OFF(ON), Terminal Type=PCPins, Thread Size=N/R
U1_1 U1_2: library part CMP-0055-01245-3, "2.7V, 650uA, 65MHz, Rail-to-Rail Input and Output Amplifiers with Shutdown Option, 5-pin SOT-23, Pb-Free", Manufacturer="Texas Instruments", Package Reference=DBV0005A, PackageTopMarking=A68A*XTT, PowerWise=Y, ComponentLink1Description="Datasheet URL", ComponentLink1URL=http://www.ti.com/general/docs/lit/getliterature.tsp?genericPartNumber=LMH6645&fileType=pdf, CompType=Amplifiers, PackageDescription="Molded SOT-23, .115 x .063 x .040 in Body, 5 Lead, .0375 in Pitch", PinCount=5, RoHS=Y
U2: library part CMP-0513-00267-1, "1 M High Speed Asynchronous CMOS SRAM with ECC, 128 K x 8, -40 to 85 degC, 32-Pin SOP (TSOP-2-32), Pb-Free", Manufacturer="Integrated Silicon Solution Inc (ISSI)", PartNumber=IS61WV1288EEBLL-10TLI, ComponentLink1Description=Buy, ComponentLink1URL=https://www.mouser.lt/ProductDetail/ISSI/IS63LV1024L-10TLI?qs=sGAEpiMZZMtm4RFapVkzrE09Sz2U0bpYMMQofUUKL3Q%3D, ComponentLink2Description=Datasheet, ComponentLink2URL=https://www.mouser.lt/datasheet/2/198/63LV1024_L-258513.pdf, DatasheetVersion="Rev. A", Density=1M, Mounting Technology="Surface Mount", Organization="128K x 8", PackageDescription="32-Pin 400 mil TSOP-2, Body 20.95 x 10.16 mm, Pitch 1.27 mm", PackageReference=TSOP-2-32, PackageVersion="Rev. E, 06/2009", Packing="Tray / Tube", RoHS=Pb-Free, Speed (ns)=10
Y1: "Crystal or Oscillator", Manufacturer_Name=ECS, Mouser Part Number=520-ECS-327-12.58X-C, ComponentLink1Description=Buy, ComponentLink1URL=https://www.mouser.lt/ProductDetail/ECS/ECS-.327-12.5-8X-C?qs=vmHwEFxEFR8ooxxsTMgFbw%3D%3D, ComponentLink2Description=Datasheet, ComponentLink2URL=https://www.mouser.lt/datasheet/2/122/ECS-.327-12.5-8X-C-1841202.pdf, Datasheet Link=https://www.mouser.in/datasheet/2/122/ECS__327_12_5_13X_C-1919094.pdf, Height=6.2mm, Manufacturer_Part_Number=ECS-.327-12.5-8X-C, Mouser Price/Stock=https://www.mouser.co.uk/ProductDetail/ECS/ECS-.327-12.5-8X-C?qs=vmHwEFxEFR8ooxxsTMgFbw%3D%3D

## Via types
v1: diameter 0.6, hole 0.3, Top Signal to Bottom Signal, 117 vias
v2: diameter 0.6, hole 0.3, Top Signal to Bottom Signal, tented both sides, 82 vias
v3: diameter 1.27, hole 0.711, Top Signal to Bottom Signal, 9 vias

## Nets (pads, with @x,y where several pads share a name; then routed paths per layer and width w, separated by ;. In a path a pad name is that pad's centre, name@x,y a point inside that pad or via, vN(x,y) a via of type N, cw(c..) or ccw(c..) an arc to the next point about the centre after c; other vN are vias at no path point)
0_IN_A+: C26_1.1 IC2.3 | length 4.9
  Top Signal w0.264: C26_1.1@71.25,42 71.284,41.966 73.531,44.212 74.307,44.212 IC2.3@74.953,44.858
0_IN_A-: C27_1.2 IC2.4 | length 2
  Top Signal w0.264: C27_1.2@73.881,43.212 74.491,43.822 74.624,43.822 IC2.4@75.306,44.504
0_IN_B+: C26_2.1 IC2.9 | length 4.7
  Top Signal w0.264: C26_2.1@73.831,39.412 73.881,39.412 74.056,39.587 74.056,39.718 IC2.9@77.074,42.737
0_IN_B-: C27_2.2 IC2.10 | length 2
  Top Signal w0.264: C27_2.2@76.35,40.831 76.35,41.063 76.6,41.313 76.6,41.555 IC2.10@77.428,42.383
3V3: C1.1 C2.1 C3.1 C4.1 C8.2 C9.2 C11.2 C12.2 C15.2 C16.2 C19.2 C20.2 C25_1.2 C25_2.2 C28.2 C29.2 C30.2 C31.2 IC2.1 IC2.12 IC2.13 IC2.25 IC2.36 IC2.48 P1.27 P1.28 P1.29 P1.57 P1.111 P1.112 R19.2 R20.2 U1_1.5 U1_2.5 U2.8 U2.24 | length 42.8
  Top Signal w0.635: v2(60.32,41.558) C25_1.2@60.701,41.178 ; C25_1.2@60.693,41.146 60.695,41.146 v2(61.179,41.63) 61.316,41.767 U1_1.5@61.316,42.293 ; v2(62.689,20.4) v2(63.495,20.4) v2@63.511,20.4 ; U2.24@63.511,19.162 v2@63.511,20.4 ; v2(64.3,20.4) v2@63.511,20.4 ; C30.2@64.731,33.612 64.731,33.597 64.781,33.547 C31.2@64.781,32.212 U2.8@64.781,30.412 64.781,29.972 63.511,28.702 v2@63.511,20.4 ; C25_2.2@84.654,25.026 84.662,25.018 v2(84.662,24.288) 84.662,24.068 U1_2.5@84.964,23.767 ; C25_2.2@84.671,25.022 v2(85.209,25.022)
  Bottom Signal w0.635: R20.2@60.981,28.312 60.984,28.308 v2(61.777,28.308) ; v2(62.689,20.4) 62.689,20.519 C29.2@63.472,21.302 ; C29.2@63.49,21.334 C28.2@63.49,22.66 ; v2@63.5,20.4 63.5,21.309 64.3,20.509 v2(64.3,20.4)
  Bottom Signal w1.27: C4.1@50.028,16.85 50.034,16.856 50.034,20.894 P1.57@50.04,20.9 ; C1.1@54.522,55.1 54.894,55.1 55.059,55.265 55.059,58.932 P1.112@55.132,59.005 ; P1.29@88.149,15.804 88.221,15.877 88.221,16.938 88.378,17.095 C2.1@88.378,19.8 ; C3.1@89.35,54.45 89.35,54.158 89.515,53.993 93.165,53.993 P1.28@93.238,53.92
  other v2: 63.45,34.45 64.25,34.45 65.05,34.45 65.85,34.45 79.05,39.05 79.159,40.033 80.1,40.1 85.75,46.55 84.8,46.7 72.4,46.85 84.7,47.6 72.331,47.778 71.35,47.9 79.1,52.25 78.35,52.9 79.8,52.9
3V3_PWR_PCB: *1.41 *1.42 *2.1 C5.1 C6.2 C7.2 C22.1 IC1.2 J7.4 P2.1 R12.2 R13.2 R14.2 | length 17.8
  Top Signal w0.254: R13.2@18.6,80.2 20.8,80.2 20.916,80.316 20.916,80.541 24,83.625 24,87.715 23.212,88.503 23.212,88.778 *2.1@22.69,89.3
  Bottom Signal w1.27: *1.42@46.58,68.44 46.58,71.644 47.245,72.309 C5.1@47.745,72.309
  other v2: 2.35,16.6 3.15,16.6 2.35,17.4 3.15,17.4 3.15,18.2 3.15,19 3.15,19.8 3.15,20.6 16.6,74.15 17.4,74.15 18.2,74.15 18.396,74.95 20.85,80.25
5V: *1.27 *1.38 *1.39 J3.1 J4.1 P3.1 | length 109.9
  Top Signal w0.75: *1.39@38.96,68.44 38.96,59.835 39.4,59.395 39.4,49 39.236,48.836 J4.1@39.236,48.256
  Bottom Signal w0.635: J3.1@36.87,90.15 36.87,69.126 36.42,68.676 *1.38@36.42,68.44 *1.39@38.96,68.44 56.62,86.1 88.2,86.1 89.54,87.44 P3.1@96.15,87.44
ADC.BIT_A0: IC2.32 P1.90 | length 11
  Top Signal w0.264: IC2.32@80.539,49.03 83.072,51.563 P1.90@83.072,59.005
ADC.BIT_A1: IC2.33 P1.89 | length 13.4
  Top Signal w0.2: IC2.33@80.185,49.383 81.95,51.148 81.95,60.423 P1.89@83.072,61.545
ADC.BIT_A2: IC2.34 P1.91 | length 13
  Top Signal w0.2: IC2.34@79.832,49.737 81.23,51.135 81.23,57.73 81.611,58.111 81.611,59.825 80.807,60.629 80.807,61.27 P1.91@80.532,61.545
ADC.BIT_A3: IC2.35 P1.92 | length 9.4
  Top Signal w0.264: IC2.35@79.478,50.091 80.532,51.144 P1.92@80.532,59.005
ADC.BIT_A4: IC2.37 P1.93 | length 12.4
  Top Signal w0.254: P1.93@77.992,61.545 79.131,60.406 79.131,57.112 77.589,55.57 77.589,51.023 78.135,50.477 IC2.37@78.135,50.444
ADC.BIT_A5: IC2.38 P1.94 | length 9.6
  Top Signal w0.254: IC2.38@77.781,50.091 77.1,50.772 77.1,57.975 77.992,58.867 P1.94@77.992,59.005
ADC.BIT_A6: IC2.39 P1.95 | length 12.6
  Top Signal w0.254: P1.95@75.452,61.545 76.531,60.466 76.531,50.634 IC2.39@77.428,49.737
ADC.BIT_A7: IC2.40 P1.96 | length 10.3
  Top Signal w0.264: P1.96@75.452,59.005 75.452,51.006 IC2.40@77.074,49.383
ADC.BIT_A8: IC2.41 P1.97 | length 14.1
  Top Signal w0.264: P1.97@72.912,61.545 74.181,60.276 74.181,51.57 IC2.41@76.721,49.03
ADC.BIT_A9: IC2.42 P1.98 | length 11.8
  Top Signal w0.264: P1.98@72.912,59.005 72.912,52.131 IC2.42@76.367,48.676
ADC.BIT_B0: IC2.21 P1.18 | length 12.6
  Top Signal w0.264: IC2.21@81.953,44.504 84.158,42.3 90.55,42.3 91.63,41.22 P1.18@93.238,41.22
ADC.BIT_B1: IC2.22 P1.17 | length 15
  Top Signal w0.264: IC2.22@82.307,44.858 83.365,43.8 91.25,43.8 92.55,42.5 94.498,42.5 P1.17@95.778,41.22
ADC.BIT_B2: IC2.23 P1.21 | length 13.8
  Top Signal w0.264: IC2.23@82.66,45.212 82.686,45.212 82.998,44.899 83.316,44.899 94.378,44.9 P1.21@95.778,46.3
ADC.BIT_B3: IC2.24 P1.22 | length 10.7
  Top Signal w0.264: IC2.24@83.014,45.565 83.208,45.371 92.112,45.371 93.041,46.3 P1.22@93.238,46.3
ADC.BIT_B4: IC2.26 P1.24 | length 11.6
  Top Signal w0.264: IC2.26@82.66,46.909 84.863,49.112 92.391,49.112 92.396,49.107 92.97,49.107 P1.24@93.238,48.84
ADC.BIT_B5: IC2.27 P1.23 | length 15.2
  Top Signal w0.264: IC2.27@82.307,47.262 85.195,50.15 94.468,50.15 P1.23@95.778,48.84
ADC.BIT_B6: IC2.28 P1.86 | length 14
  Top Signal w0.264: IC2.28@81.953,47.616 88.152,53.814 P1.86@88.152,59.005
ADC.BIT_B7: IC2.29 P1.85 | length 16.3
  Top Signal w0.264: IC2.29@81.6,47.969 86.9,53.27 86.9,59.774 88.152,61.026 P1.85@88.152,61.545
ADC.BIT_B8: IC2.30 P1.88 | length 12.5
  Top Signal w0.264: IC2.30@81.246,48.323 85.612,52.689 P1.88@85.612,59.005
ADC.BIT_B9: IC2.31 P1.87 | length 14.8
  Top Signal w0.264: IC2.31@80.892,48.676 84.4,52.184 84.4,59.814 85.612,61.026 P1.87@85.612,61.545
ADC.CLK+: P1.6 R10.1 | length 3.2
  Top Signal w0.254: R10.1@90.919,28.131 90.962,28.131 93.113,25.98 P1.6@93.238,25.98
ADC.CLK-: P1.7 R11.2 | length 5.9
  Top Signal w0.254: R11.2@90.874,31.018 92.042,29.85 94.447,29.85 P1.7@95.778,28.52
ADC.DCLKA: IC2.44 P1.100 | length 13.2
  Top Signal w0.264: P1.100@70.372,59.005 70.372,53.257 IC2.44@75.66,47.969
ADC.DCLKB: IC2.20 P1.15 | length 16.4
  Top Signal w0.264: IC2.20@81.6,44.151 84.85,40.9 89.95,40.9 90.9,39.95 94.507,39.95 P1.15@95.778,38.68
ADC.DORA: IC2.43 P1.99 | length 15.6
  Top Signal w0.264: P1.99@70.372,61.545 71.631,60.286 71.631,52.706 IC2.43@76.013,48.323
ADC.DORB: IC2.19 P1.16 | length 14.1
  Top Signal w0.264: IC2.19@81.246,43.797 86.364,38.68 P1.16@93.238,38.68
ADC.SHDN: IC2.7 P1.106 | length 23.3
  Top Signal w0.254: v2(75.9,42.4) 75.966,42.466 75.966,43.01 76.367,43.411 IC2.7@76.367,43.444
  Bottom Signal w0.254: P1.106@62.831,59.005 62.831,55.512 75.9,42.442 v2(75.9,42.4)
ADC.SPI_CS: IC2.47 P1.104 | length 16
  Top Signal w0.254: P1.104@65.292,59.005 65.292,56.216 69.296,52.212 ; 69.281,52.212 69.296,52.212 ; IC2.47@74.599,46.909 69.296,52.212
ADC.SPI_SCLK: IC2.46 P1.102 | length 14.7
  Top Signal w0.264: P1.102@67.832,59.005 67.832,54.383 IC2.46@74.953,47.262
ADC.SPI_SDIN: IC2.45 P1.101 | length 17
  Top Signal w0.264: P1.101@67.832,61.545 67.832,61.311 69.081,60.062 69.081,53.841 IC2.45@75.306,47.616
ADC.SYNC: IC2.14 P1.5 | length 23.8
  Top Signal w0.254: IC2.14@79.478,42.03 79.478,41.997 80.187,41.288 v2(80.187,41.237)
  Bottom Signal w0.254: v2(80.187,41.237) 80.194,41.237 91.6,29.831 91.6,28.466 92.816,27.25 94.507,27.25 P1.5@95.778,25.98
ANALOG_INA: J2.1 R15_1.1 | length 9.5
  Top Signal w0.264: J2.1@47.6,60.1 50.2,60.1 52.75,57.55 52.75,56.6 R15_1.1@54.381,54.969